# Altium PCB M2_to_USB3.PcbDoc
Units mm, origin at the board's own origin, x right, y up, seen from the top; angles counter-clockwise.
Board outline 22 x 80 mm, 2 copper layers (Top Layer, Bottom Layer), stack 0.87 mm thick; 2 components, 13 nets, 89 pads, 77 vias.
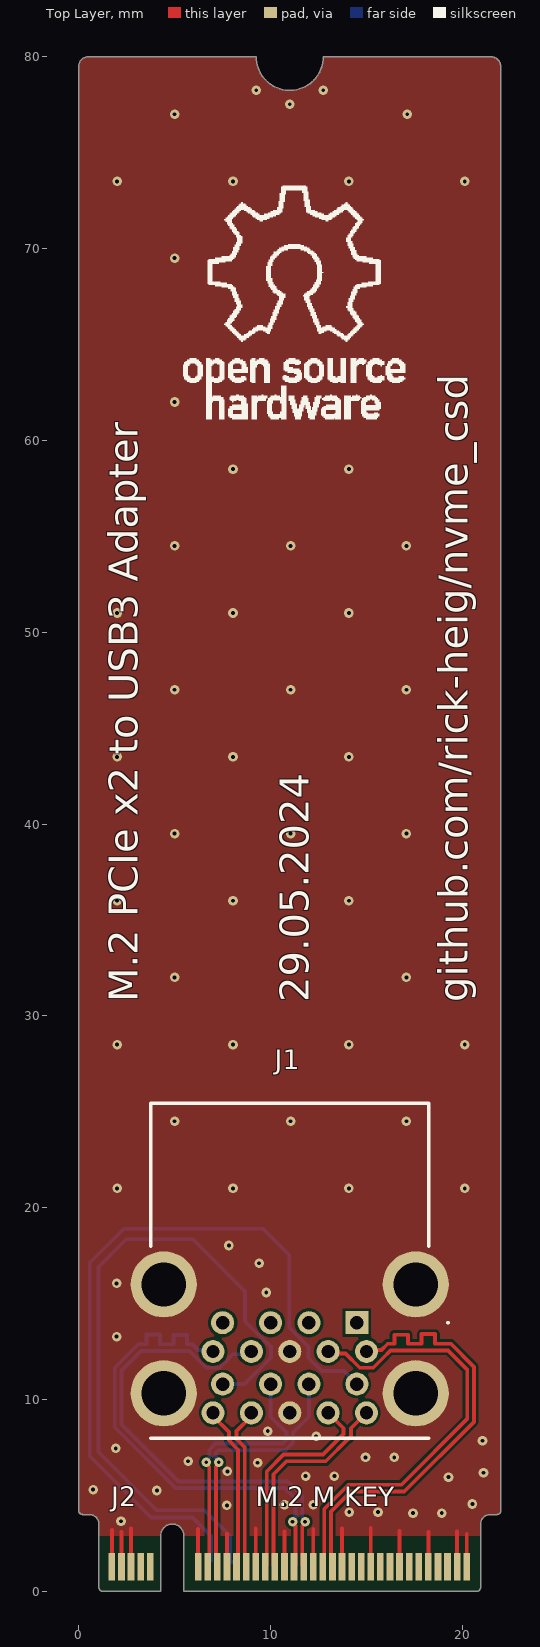
[diagram p0: Top Layer view]
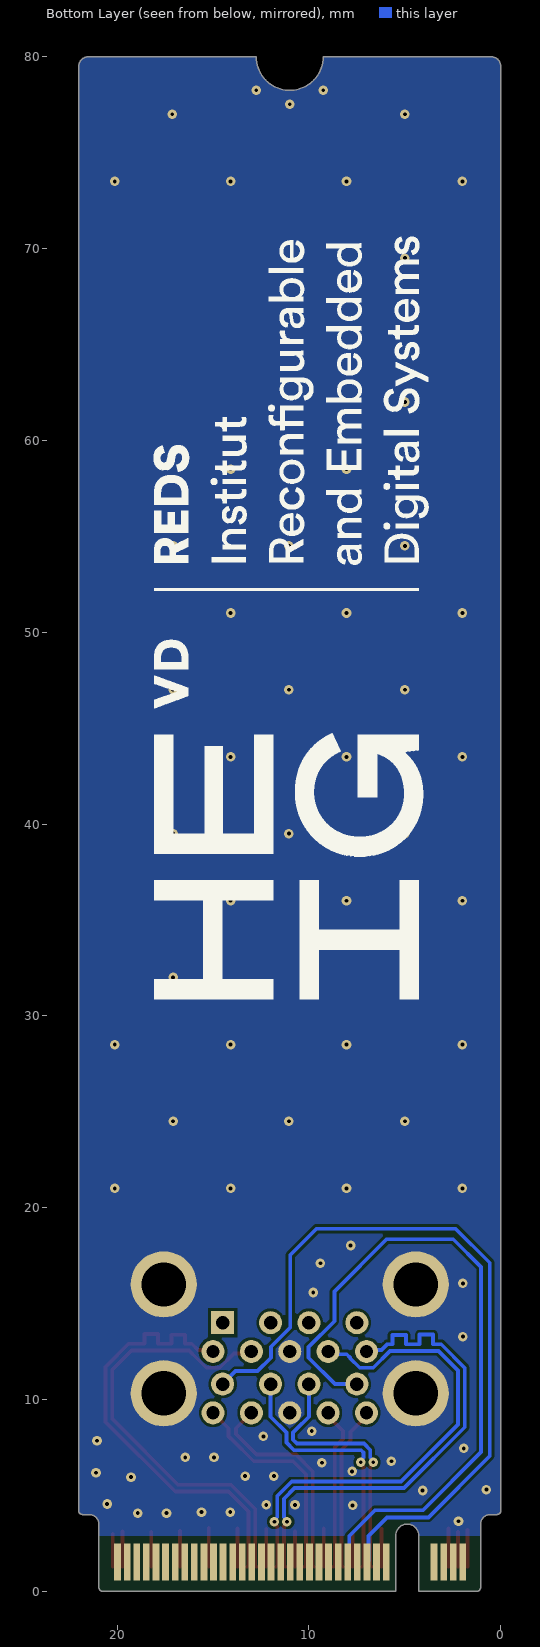
[diagram p1: Bottom Layer view, seen from below]

## Layer stack, top to bottom
Top Solder: solder mask 0.0254, Solder Resist, Dk 3.5
Top Layer: signal copper 0.035
Dielectric 1: dielectric 0.8, FR-4, Dk 4.8
Bottom Layer: signal copper 0.035
Bottom Solder: solder mask 0.0254, Solder Resist, Dk 3.5

## Board outline
1.05,0.2 ccw(c1.25,0.2) 1.25,0 4.275,0 4.275,2.9 cw(c4.875,2.9) 4.875,3.5 cw(c4.875,2.9) 5.475,2.9 5.475,0 20.75,0 ccw(c20.75,0.2) 20.95,0.2 20.95,3.5 cw(c21.45,3.5) 21.45,4 21.8,4 ccw(c21.8,4.2) 22,4.2 22,79.5 ccw(c21.5,79.5) 21.5,80 12.75,80 cw(c11,80) 9.25,80 0.5,80 ccw(c0.5,79.5) 0,79.5 0,4.2 ccw(c0.2,4.2) 0.2,4 0.55,4 cw(c0.55,3.5) 1.05,3.5

## Design rules (kind name [scope] priority, off if disabled: settings)
Clearance [All] p1: gap=0.15 ignorepadtopadclearanceinfootprint=FALSE except(0.149: Track-SMDPad SMDPad-SMDPad)
Clearance Clearance_DIFF [InAnyDifferentialPair] p2: gap=0.15 ignorepadtopadclearanceinfootprint=FALSE
Clearance Clearance_TOP [InNamedPolygon('GND-TOP')] p3: gap=0.15 ignorepadtopadclearanceinfootprint=FALSE
Clearance Clearance_BOTTOM [InNamedPolygon('GND-BOTTOM')] p4: gap=0.15 ignorepadtopadclearanceinfootprint=FALSE
ComponentClearance [All] p1: gap=0.254 collisioncheckmode=3 verticalgap=0.254 showdistances=FALSE donotcheckwithout3dbody=TRUE
DiffPairsRouting [All] p1: maxlimit=0.15 minlimit=0.15 mostfreqgap=0.15 toplayer_minwidth=0.2 toplayer_maxwidth=0.2 toplayer_prefwidth=0.2 bottomlayer_minwidth=0.2 bottomlayer_maxwidth=0.2 bottomlayer_prefwidth=0.2 impedanceprofiledriven=TRUE impedanceprofileid={8BE430F4-6E11-4254-9D0B-8478A02E9357} impedanceprofilevalue=100.000000 maxuncoupledlength=12.7
HoleSize [All] p1: absolutevalues=TRUE maxlimit=5 minlimit=0.025 maxpercent=80.000 minpercent=20.000
HoleToHoleClearance [All] p1: gap=0.15 allowstackedmicrovias=TRUE
Length [All] p1: maxlimit=2540 minlimit=0
MatchedLengths MatchLengths_xSignals_J2_J1 [All] p1: tolerance=0.05 checknetsindiffpair=TRUE checkdiffpairvsdiffpair=FALSE checkxsignals=FALSE checkothers=FALSE
MinimumSolderMaskSliver [All] p1: minsoldermaskwidth=0.075
PlaneConnect [All] p1: planeconnectstyle=Direct reliefexpansion=0.508 reliefentries=4 reliefconductorwidth=0.254 reliefairgap=0.254
PolygonConnect PolygonConnect_4 [All vs IsNamedPolygon('GND-BOTTOM')] p1: connectstyle=Direct reliefconductorwidth=0.254 reliefentries=4 polygonreliefangle="90 Angle" airgapwidth=0.254
PolygonConnect PolygonConnect_3 [All vs IsNamedPolygon('GND-TOP')] p2: connectstyle=Direct reliefconductorwidth=0.254 reliefentries=4 polygonreliefangle="90 Angle" airgapwidth=0.254
PolygonConnect PolygonConnect_2 [All vs IsNamedPolygon('GND-BOTTOM')] p3: connectstyle=Direct reliefconductorwidth=0.254 reliefentries=4 polygonreliefangle="90 Angle" airgapwidth=0.254
PolygonConnect PolygonConnect_1 [All vs IsNamedPolygon('GND-BOTTOM')] p4: connectstyle=Direct reliefconductorwidth=0.254 reliefentries=4 polygonreliefangle="90 Angle" airgapwidth=0.254
PolygonConnect [All] p5: connectstyle=Relief reliefconductorwidth=0.254 reliefentries=4 polygonreliefangle="90 Angle" airgapwidth=0.254
RoutingVias [All] p1: holewidth=0.2 width=0.5 viastyle="Through Hole" minholewidth=0.15 minwidth=0.4 maxholewidth=0.4 maxwidth=0.8
SolderMaskExpansion [All] p1: expansion=0.102 istentingtop=FALSE
Width [All] p1: maxlimit=0.4 minlimit=0.1 preferedwidth=0.2
24 further rules are at their usual default settings.

## Classes and differential pairs
differential pair PE4: +PE4_A -PE4_B
differential pair PE3: +PE3_A -PE3_B
differential pair PE2: +PE2_A -PE2_B
differential pair PE1: +PE1_A -PE1_B
differential pair CLK: +CLK_A -CLK_B

## Components (designator, comment, footprint, x,y, rotation, side; value= is the part's Value field where it differs from the comment)
J1 "48406-0001" 484060001 14.5,14 r270 top locked
J2 "NGFF_M_V2" M.2-M-KEY-2280-V2 10.975,0 r0 top locked value=NGFF_M

## Footprints (in the part's own frame and the unit in brackets; to place one, negate y for a bottom-side part, rotate by r counter-clockwise, add the part's x,y. Pads: shape width x height; smd on the part's side, far side on the other; paste and mask are expansions set on the pad)
484060001 [mm]
  rect 1.2x1.2 hole 0.7: 1(0,0)
  round 1.2 hole 0.7: 2(0,-2.5) 3(0,-4.5) 4(0,-7) 5(1.5,-7.5) 6(1.5,-5.5) 7(1.5,-3.5) 8(1.5,-1.5) 9(1.5,0.5) 10(3.2,0) 11(3.2,-2.5) 12(3.2,-4.5) 13(3.2,-7) 14(4.7,-7.5) 15(4.7,-5.5) 16(4.7,-3.5) 17(4.7,-1.5) 18(4.7,0.5)
  round 3.45 hole 2.3: MH1(-2,3.07) MH2(-2,-10.07) MH3(3.68,3.07) MH4(3.68,-10.07)
  silkscreen extent -11.44,-10.75 6.02,4.8, body extent -11.44,-11.36 6.02,4.31, height 16.22
M.2-M-KEY-2280-V2 [mm] "M.2-KEY-M"
  rect 0.35x1.45 smd mask+0: 1(9.25,1.275) 3(8.75,1.275) 5(8.25,1.275) 7(7.75,1.275) 9(7.25,1.275) 11(6.75,1.275) 13(6.25,1.275) 15(5.75,1.275) 17(5.25,1.275) 19(4.75,1.275) 21(4.25,1.275) 23(3.75,1.275) 25(3.25,1.275) 27(2.75,1.275) 29(2.25,1.275) 31(1.75,1.275) 33(1.25,1.275) 35(0.75,1.275) 37(0.25,1.275) 39(-0.25,1.275) 41(-0.75,1.275) 43(-1.25,1.275) 45(-1.75,1.275) 47(-2.25,1.275) 49(-2.75,1.275) 51(-3.25,1.275) 53(-3.75,1.275) 55(-4.25,1.275) 57(-4.75,1.275) 67(-7.25,1.275) 69(-7.75,1.275) 71(-8.25,1.275) 73(-8.75,1.275) 75(-9.25,1.275)
  rect 0.35x1.95 smd far side mask+0: 2(9,1.525) 4(8.5,1.525) 6(8,1.525) 8(7.5,1.525) 10(7,1.525) 12(6.5,1.525) 14(6,1.525) 16(5.5,1.525) 18(5,1.525) 20(4.5,1.525) 22(4,1.525) 24(3.5,1.525) 26(3,1.525) 28(2.5,1.525) 30(2,1.525) 32(1.5,1.525) 34(1,1.525) 36(0.5,1.525) 38(0,1.525) 40(-0.5,1.525) 42(-1,1.525) 44(-1.5,1.525) 46(-2,1.525) 48(-2.5,1.525) 50(-3,1.525) 52(-3.5,1.525) 54(-4,1.525) 56(-4.5,1.525) 58(-5,1.525) 68(-7.5,1.525) 70(-8,1.525) 72(-8.5,1.525) 74(-9,1.525)

## Part data
J1: "Connector", Manufacturer_Name=Molex, Mouser Part Number=538-48406-0001, Datasheet Link=https://www.molex.com/content/dam/molex/molex-dot-com/products/automated/en-us/salesdrawingpdf/484/48406/484060001_sd.pdf, Height=15.65mm, Manufacturer_Part_Number=48406-0001, Mouser Price/Stock=https://www.mouser.co.uk/ProductDetail/Molex/48406-0001?qs=tkvX2tz6JTEgpbDeTYwKTA%3D%3D

## Via types
v1: diameter 0.5, hole 0.2, Top Layer to Bottom Layer, tented both sides, 77 vias

## Nets (pads, with @x,y where several pads share a name; then routed paths per layer and width w, separated by ;. In a path a pad name is that pad's centre, name@x,y a point inside that pad or via, vN(x,y) a via of type N, cw(c..) or ccw(c..) an arc to the next point about the centre after c; other vN are vias at no path point)
CLK_A: J1.12 J2.55 | length 13.7
  Top Layer w0.2: v1(6.65,6.725) 6.65,6.644 6.8,6.494 6.8,2.104 6.8,1.35 J2.55
  Bottom Layer w0.2: v1(6.65,6.725) 6.65,6.806 6.8,6.956 6.8,7.37 7.13,7.7 10.63,7.7 10.825,7.895 10.825,8.275 10.65,8.45 10.648,8.45 10,9.098 J1.12
CLK_B: J1.11 J2.53 | length 13.7
  Top Layer w0.2: J2.53 7.15,1.35 7.15,2.104 7.15,6.494 7.3,6.644 v1(7.3,6.725)
  Bottom Layer w0.2: v1(7.3,6.725) 7.3,6.806 7.15,6.956 7.15,7.225 7.275,7.35 10.775,7.35 11.175,7.75 11.175,8.273 12,9.098 J1.11
GND: J1.7 J1.16 J1.MH1 J1.MH2 J1.MH3 J1.MH4 J2.1 J2.3 J2.9 J2.15 J2.21 J2.27 J2.33 J2.39 J2.45 J2.51 J2.57 J2.71 J2.73 J2.75 | length 26.6
  Top Layer w0.2: J2.75 1.725,3.2 ; J2.73 2.225,3.1 ; J2.71 2.725,3.275 ; J2.57 6.225,3.25 ; J2.51 7.725,3 ; J2.45 9.225,3.275 ; J2.39 10.725,3.116 ; J2.33 12.225,3.25 ; J2.27 13.725,3.275 ; J2.21 15.225,3.3 ; J2.15 16.725,3.15 ; J2.9 18.225,3.1 ; J2.3 19.725,3.125 ; J2.1 20.225,3
  other v1: 2.2,3.65 17.425,4.075 18.925,4.075 14.1,4.125 15.6,4.125 7.725,4.475 10.725,4.5 12.225,4.5 20.525,4.55 4.075,5.25 0.75,5.3 19.275,5.95 11.825,6 13.325,6 21.1,6.175 7.75,6.25 9.325,6.7 5.7,6.775 14.95,6.975 16.45,6.975 1.925,7.45 21.05,7.85 12.375,8.075 9.85,8.35 1.975,13.275 9.775,15.575 1.975,16.05 9.4,17.1 7.825,18.025 2,21 8.042,21 14.083,21 20.125,21 5,24.5 11.042,24.5 17.083,24.5 2,28.5 8.042,28.5 14.083,28.5 20.125,28.5 5,32 17.083,32 2,36 8.042,36 14.083,36 5,39.5 11.042,39.5 17.083,39.5 2,43.5 8.042,43.5 14.083,43.5 5,47 11.042,47 17.083,47 2,51 8.042,51 14.083,51 5,54.5 11.042,54.5 17.083,54.5 8.042,58.5 14.083,58.5 5,62 5,69.5 2,73.5 8.042,73.5 14.083,73.5 20.125,73.5 5,77 17.125,77 11,77.525 9.25,78.25 12.75,78.25
PE1_A: J1.14 J2.49 | length 8.6
  Top Layer w0.2: J1.14 7,9.125 7.825,8.3 7.825,7.85 8.3,7.375 8.3,2.017 8.3,1.35 J2.49
PE1_B: J1.15 J2.47 | length 8.6
  Top Layer w0.2: J2.47 8.65,1.35 8.65,2.017 8.65,7.52 8.225,7.945 8.225,8.35 9,9.125 J1.15
PE2_A: J1.17 J2.43 | length 11.2
  Top Layer w0.2: J2.43 9.8,1.35 9.8,2.104 9.8,6.245 10.68,7.125 12.734,7.125 13.8,8.191 13.8,8.5 J1.17
PE2_B: J1.18 J2.41 | length 11.3
  Top Layer w0.2: J2.41 10.15,1.35 10.15,2.104 10.15,6.1 10.825,6.775 12.879,6.775 14.06,7.956 14.085,7.956 14.2,8.071 14.2,8.5 J1.18
PE3_A: J1.5 J2.37 | length 25.5
  Top Layer w0.2: v1(11.15,3.625) 11.15,3.544 11.3,3.394 11.3,2.017 11.3,1.35 J2.37
  Bottom Layer w0.2: J1.5 6.924,12.576 6.217,12.576 5.927,12.866 5.918,12.875 5.649,12.875 5.649,13.356 4.941,13.356 4.941,12.875 4.233,12.875 4.233,13.386 3.525,13.386 3.525,12.875 3.425,12.875 3.105,12.875 1.875,11.645 1.875,8.55 5.05,5.375 10.75,5.375 11.3,4.825 11.3,3.856 11.15,3.706 v1(11.15,3.625)
PE3_B: J1.6 J2.35 | length 25.6
  Top Layer w0.2: J2.35 11.65,1.35 11.65,2.017 11.65,3.394 11.8,3.544 v1(11.8,3.625)
  Bottom Layer w0.2: J1.6 8.858,12.358 8.025,12.358 7.85,12.183 7.85,12.148 7.352,11.65 6.648,11.65 5.773,12.525 3.25,12.525 2.225,11.5 2.225,8.695 5.195,5.725 10.895,5.725 11.65,4.97 11.65,3.856 11.8,3.706 v1(11.8,3.625)
PE4_A: J1.8 J2.31 | length 23.4
  Top Layer w0.2: J2.31 12.8,1.35 12.8,2.104 ; 12.8,2.104 12.8,4.295 14.055,5.55 16.825,5.55 20.25,8.975 20.25,11.555 19.255,12.55 18.875,12.55 16.25,12.55 15.85,12.15 15.85,12.148 15.352,11.65 14.648,11.65 13.9,12.398 13.102,12.398 J1.8
PE4_B: J1.9 J2.29 | length 23.4
  Top Layer w0.2: J2.29 13.15,1.35 13.15,2.104 13.15,4.15 14.2,5.2 16.97,5.2 20.6,8.83 20.6,11.7 19.4,12.9 19.387,12.9 18.579,12.9 18.579,13.413 17.871,13.413 17.871,12.9 17.163,12.9 17.163,13.374 16.455,13.374 16.455,12.9 16.105,12.9 16.082,12.877 15.783,12.578 15.145,12.578 15.111,12.611 J1.9
PERST: J1.13 J2.50 | length 36.2
  Bottom Layer w0.2: J1.13 8.65,10.8 10.025,12.175 10.025,12.725 8.675,14.075 8.675,15.625 5.95,18.35 2.475,18.35 1.025,16.9 1.025,7.25 4.05,4.225 6.55,4.225 7.9,2.875 7.9,1.6 J2.50
WAKE#1: J1.10 J2.54 | length 40
  Bottom Layer w0.2: J2.54@6.9,1.6 6.9,2.875 5.925,3.85 3.775,3.85 0.575,7.05 0.575,17.125 2.35,18.9 9.6,18.9 10.975,17.525 10.975,13.75 11.975,12.75 11.975,12.175 12.675,11.475 13.825,11.475 J1.10
pads on no net: J1.1 J1.2 J1.3 J1.4 J2.2 J2.4 J2.5 J2.6 J2.7 J2.8 J2.10 J2.11 J2.12 J2.13 J2.14 J2.16 J2.17 J2.18 J2.19 J2.20 J2.22 J2.23 J2.24 J2.25 J2.26 J2.28 J2.30 J2.32 J2.34 J2.36 J2.38 J2.40 J2.42 J2.44 J2.46 J2.48 J2.52 J2.56 J2.58 J2.67 J2.68 J2.69 J2.70 J2.72 J2.74

## Polygon pours and split planes (outlines as drawn)
no net on Bottom Solder "GND-001" (solid): 13.85,80 cw(c11,80) 8.15,80 9.25,80 ccw(c11,80) 12.75,80
no net on Top Solder "GND-001" (solid): 13.85,80 cw(c11,80) 8.15,80 9.25,80 ccw(c11,80) 12.75,80
GND on Top Layer "GND-TOP" (solid, pour order 3): 1.05,2.9 4.275,2.9 cw(c4.875,2.9) 4.875,3.5 cw(c4.875,2.9) 5.475,2.9 20.95,2.9 20.95,3.5 cw(c21.45,3.5) 21.45,4 21.8,4 ccw(c21.8,4.2) 22,4.2 22,79.5 ccw(c21.5,79.5) 21.5,80 12.75,80 cw(c11,80) 9.25,80 0.5,80 ccw(c0.5,79.5) 0,79.5 0,4.2 ccw(c0.2,4.2) 0.2,4 0.55,4 cw(c0.55,3.5) 1.05,3.5
GND on Bottom Layer "GND-TOP" (solid, pour order 2): 1.05,2.9 4.275,2.9 cw(c4.875,2.9) 4.875,3.5 cw(c4.875,2.9) 5.475,2.9 20.95,2.9 20.95,3.5 cw(c21.45,3.5) 21.45,4 21.8,4 ccw(c21.8,4.2) 22,4.2 22,79.5 ccw(c21.5,79.5) 21.5,80 12.75,80 cw(c11,80) 9.25,80 0.5,80 ccw(c0.5,79.5) 0,79.5 0,4.2 ccw(c0.2,4.2) 0.2,4 0.55,4 cw(c0.55,3.5) 1.05,3.5

## Silkscreen, mask and mechanical layers (free items; w line width, h text height)
Top Overlay:
  drawing of 18 lines, arcs and shapes, not listed
  text "M.2 PCIe x2 to USB3 Adapter" at 3.063,30.704 h1.52 r90
  text "29.05.2024" at 11.996,30.704 h1.52 r90
  text "github.com/rick-heig/nvme_csd" at 20.288,30.704 h1.52 r90
  text "M.2 M KEY" at 9.225,4.425 h1
Bottom Overlay:
  drawing of 61 lines, arcs and shapes, not listed
Mechanical 1:
  the board outline again, w0.2